# Altium PCB JLC_LED_PCB.PcbDoc (part 2 of 2)
Units mm, origin at the board's own origin, x right, y up, seen from the top; angles counter-clockwise.
Board outline 99.87 x 66.87 mm, 2 copper layers (Top Layer, Bottom Layer); 124 components, 99 nets, 405 pads, 296 vias.
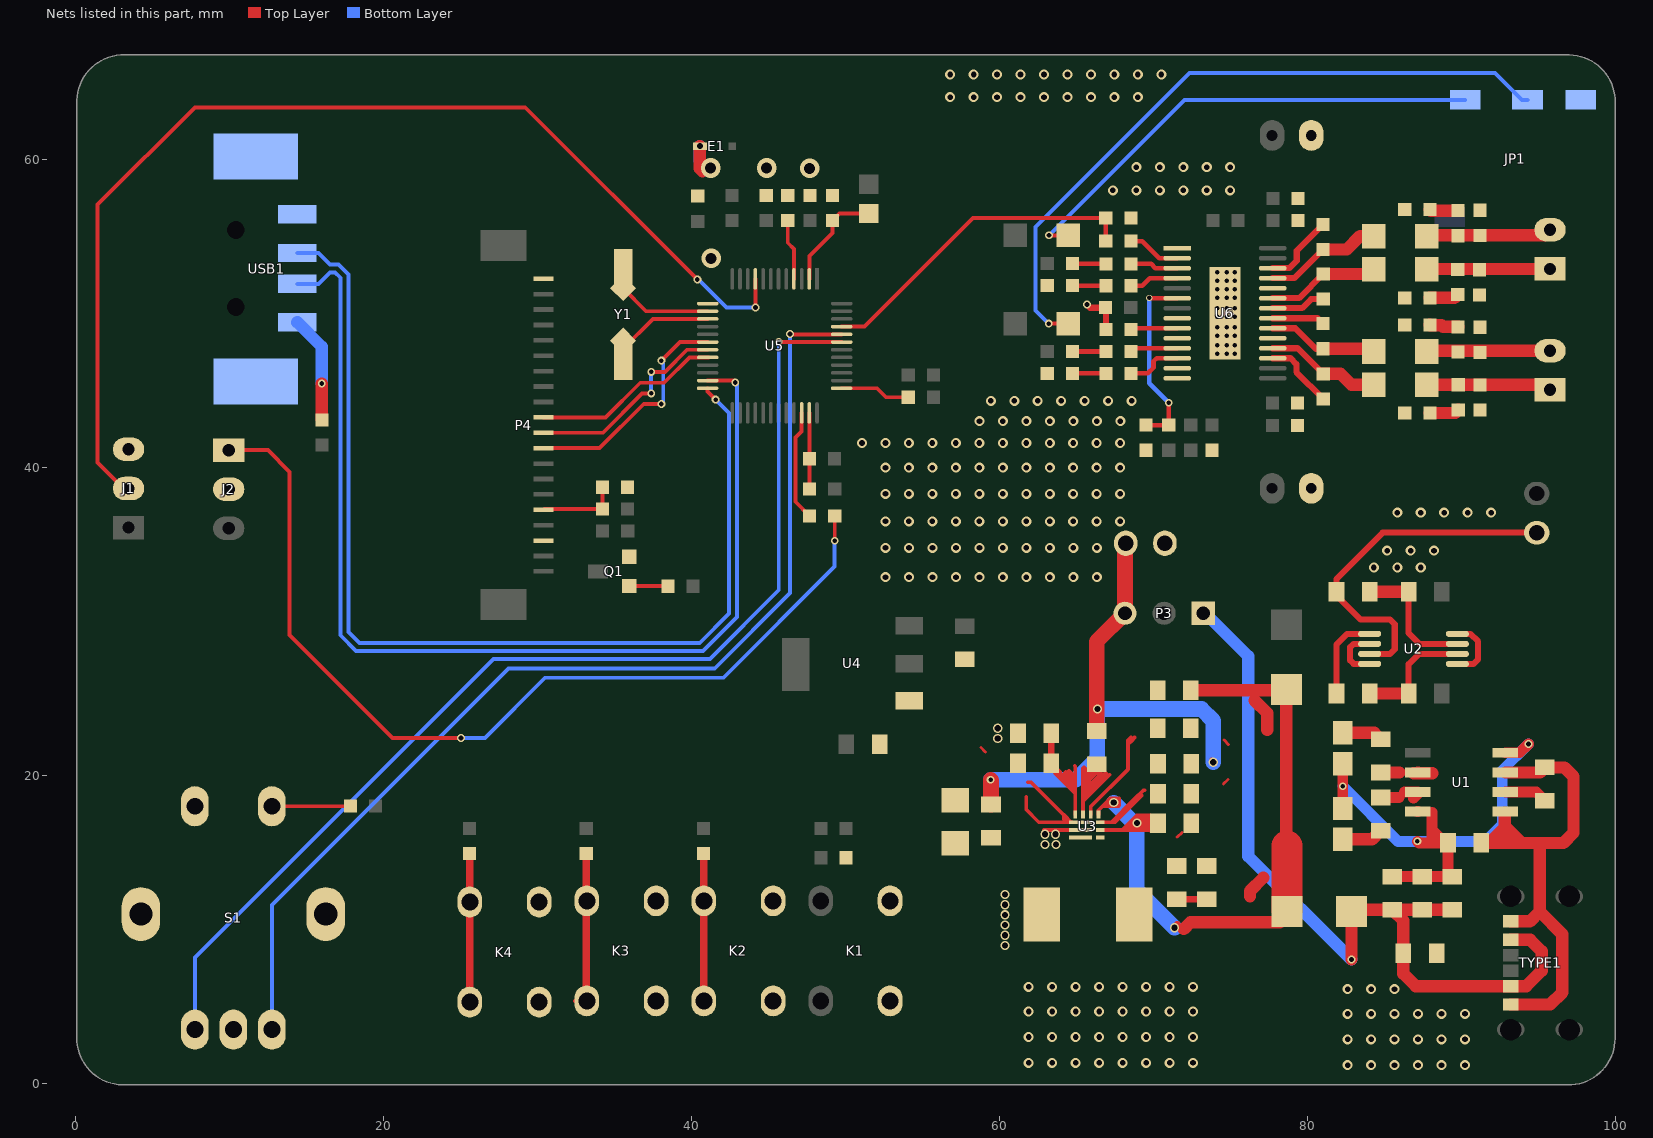
[diagram p2: the nets of this part, all layers, seen from the top]

## Via types
v1: diameter 0.65, hole 0.365, Top Layer to Bottom Layer, tented both sides, 174 vias
v2: diameter 0.508, hole 0.305, Top Layer to Bottom Layer, 51 vias
v3: diameter 0.6, hole 0.3, Top Layer to Bottom Layer, 38 vias
v4: diameter 0.6, hole 0.4, Top Layer to Bottom Layer, 17 vias
v5: diameter 3.2, hole 3, Top Layer to Bottom Layer, 5 vias
v6: diameter 1.27, hole 0.711, Top Layer to Bottom Layer, 4 vias
v7: diameter 0.5, hole 0.3, Top Layer to Bottom Layer, 4 vias
v8: diameter 0.4, hole 0.305, Top Layer to Bottom Layer, 1 vias
v9: diameter 0.4, hole 0.3, Top Layer to Bottom Layer, 1 vias
v10: diameter 0.6/0.6 (per signal layer), hole 0.3, Top Layer to Bottom Layer, 1 vias

## Nets (pads, with @x,y where several pads share a name; then routed paths per layer and width w, separated by ;. In a path a pad name is that pad's centre, name@x,y a point inside that pad or via, vN(x,y) a via of type N, cw(c..) or ccw(c..) an arc to the next point about the centre after c; other vN are vias at no path point) (continued)
GND: C1.2 C2.2 C3.1 C5.1 C6.2 C7.1 C8.1 C9.2 C10.2 C11.1 C12.1 C16.1 C17.1 C18.1 C19.1 C21.2 C22.2 C23.2 C24.2 C25.2 C31.2 C34.2 C35.1 C37.1 C41.2 C43.2 C44.1 C45.1 E1.2@40.521,60.884 J1.3 J2.2 JP1.1 K1.2 K2.2 K3.2 K4.2 L2.1 P2.2 P4.3 P4.20 Q1.2 R6.1 R8.2 R13.1 R14.1 R23.2 R24.1 R30.2 R33.1 R34.1 R36.1 R38.1 R39.1 R41.1 R42.1 S1.2 S1.5 S1.6 S1.7 TYPE1.1 TYPE1.6 U1.1 U1.3 U2.6 U3.3 U3.4 U4.1 U5.13 U6.1 U6.8 U6.10 U6.13 U6.14 U6.19 U6.24 U6.29 USB1.4 USB1.5 USB1.6 | length 51.5
  Top Layer w0.2: 71.514,16.029 71.819,16.308 ; 74.511,19.483 74.816,19.762 ; 74.562,22.328 74.841,22.023 ; C3.1@88.354,8.151 C3.1@88.354,8.481
  Top Layer w0.4: v2(65.659,50.597) 65.862,50.394 C34.2@66.866,50.394 66.889,50.371 C35.1@66.889,48.971 ; C2.2@86.54,25.347 86.54,27.241 87.216,27.917 U2.6@89.705,27.917
  Top Layer w0.8: E1.2@40.521,60.884 40.521,59.431 v6@40.694,59.258 ; R8.2@84.011,25.347 86.515,25.347 85.753,25.347 ; C1.2@91.25,15.644 91.783,15.644 ; 92.774,16.609 U1.1@92.774,17.606 ; U1.3@92.824,20.222 95.066,20.222 R6.1@95.39,20.546 96.657,20.546 97.244,19.959 97.244,16.304 96.584,15.644 94.793,15.644 ; TYPE1.1@93.168,5.149 95.725,5.149 96.52,5.944 96.52,9.71 95.047,11.184 ; TYPE1.6@93.168,10.549 94.412,10.549 95.047,11.184 ; 91.783,15.644 92.824,16.685 ; 91.783,15.644 92.901,15.644 ; 92.824,16.685 92.824,15.72 92.901,15.644 ; 92.824,16.685 93.866,15.644 ; 92.901,15.644 93.866,15.644 ; 93.866,15.644 94.793,15.644 ; 94.793,15.644 95.047,15.39 95.047,11.184
  Bottom Layer w0.8: 40.499,59.919 40.521,59.941 E1.2@40.521,60.884
  other v1: 82.575,1.219 84.099,1.219 85.623,1.219 87.147,1.219 88.671,1.219 90.195,1.219 61.874,1.372 63.398,1.372 64.922,1.372 66.446,1.372 67.97,1.372 69.494,1.372 71.018,1.372 72.542,1.372 82.575,2.895 84.099,2.895 85.623,2.895 87.147,2.895 88.671,2.895 90.195,2.895 61.874,3.047 63.398,3.047 64.922,3.047 66.446,3.047 67.97,3.047 69.494,3.047 71.018,3.047 72.542,3.047 82.575,4.547 84.099,4.547 85.623,4.547 87.147,4.547 88.671,4.547 90.195,4.547 61.874,4.699 63.398,4.699 64.922,4.699 66.446,4.699 67.97,4.699 69.494,4.699 71.018,4.699 72.542,4.699 82.575,6.147 84.099,6.147 85.623,6.147 61.874,6.299 63.398,6.299 64.922,6.299 66.446,6.299 67.97,6.299 69.494,6.299 71.018,6.299 72.542,6.299 52.578,32.903 54.102,32.903 55.626,32.903 57.15,32.903 58.674,32.903 60.198,32.903 61.722,32.903 63.246,32.903 64.77,32.903 66.294,32.903 84.277,33.528 85.801,33.528 87.325,33.528 85.141,34.619 86.665,34.619 88.189,34.619 52.578,34.804 54.102,34.804 55.626,34.804 57.15,34.804 58.674,34.804 60.198,34.804 61.722,34.804 63.246,34.804 64.77,34.804 66.294,34.804 52.572,36.525 54.096,36.525 55.62,36.525 57.144,36.525 58.668,36.525 60.192,36.525 61.716,36.525 63.24,36.525 64.764,36.525 66.288,36.525 67.812,36.525 85.801,37.084 87.325,37.084 88.849,37.084 90.373,37.084 91.897,37.084 52.572,38.303 54.096,38.303 55.62,38.303 57.144,38.303 58.668,38.303 60.192,38.303 61.716,38.303 63.24,38.303 64.764,38.303 66.288,38.303 67.812,38.303 52.572,40.005 54.096,40.005 55.62,40.005 57.144,40.005 58.668,40.005 60.192,40.005 61.716,40.005 63.24,40.005 64.764,40.005 66.288,40.005 67.812,40.005 51.048,41.605 52.572,41.605 54.096,41.605 55.62,41.605 57.144,41.605 58.668,41.605 58.668,41.605 60.192,41.605 61.716,41.605 63.24,41.605 64.764,41.605 66.288,41.605 67.812,41.605 58.674,43.028 60.198,43.028 61.722,43.028 63.246,43.028 64.77,43.028 66.294,43.028 67.818,43.028 59.411,44.343 60.935,44.343 62.459,44.343 63.983,44.343 65.507,44.343 67.031,44.343 68.555,44.343 67.335,58.014 68.859,58.014 70.383,58.014 71.907,58.014 73.431,58.014 74.955,58.014 68.859,59.512 70.383,59.512 71.907,59.512 73.431,59.512 74.955,59.512 56.769,64.059 58.293,64.059 59.817,64.059 61.341,64.059 62.865,64.059 64.389,64.059 65.913,64.059 67.437,64.059 68.961,64.059 56.769,65.532 58.293,65.532 59.817,65.532 61.341,65.532 62.865,65.532 64.389,65.532 65.913,65.532 67.437,65.532 68.961,65.532 70.485,65.532
  other v3: 74.117,47.396 74.727,47.396 75.26,47.396 74.117,47.955 74.727,47.955 75.26,47.955 74.117,48.565 74.727,48.565 75.26,48.565 74.117,49.124 74.727,49.124 75.26,49.124 74.117,49.809 74.727,49.809 75.26,49.809 74.117,50.368 74.727,50.368 75.26,50.368 74.117,51.029 74.727,51.029 75.26,51.029 74.117,51.587 74.727,51.587 75.26,51.587 74.117,52.146 74.727,52.146 75.26,52.146 74.117,52.705 74.727,52.705 75.26,52.705
  other v4: 59.861,22.429 59.861,23.09
  other v6: 41.25,53.594 47.648,59.436 41.225,59.461 44.856,59.461
GVDD: C35.2 U6.9 | length 2.9
  Top Layer w0.3: C35.2@68.611,49.063 U6.9@71.513,49.063
HPVDD: C15.2 R16.1 U5.35 | length 4.9
  Top Layer w0.254: U5.35@47.629,43.562 47.629,40.602 C15.2@47.641,40.589 47.641,38.641 R16.1@47.648,38.633
IRDA: R26.1 U5.34 | length 7.2
  Top Layer w0.254: U5.34@47.129,43.562 47.129,42.353 46.736,41.961 46.736,37.793 R26.1@47.648,36.881
L+: C25.1 C26.2 J3.2 L3.2 | length 8.1
  Top Layer w0.8: L3.2@87.75,55.087 C25.1@91.173,55.087 95.357,55.087 J3.2@95.717,55.448
L-: C29.2 C31.1 J3.1 L4.2 | length 8.1
  Top Layer w0.254: J3.1@95.659,53.008 J3.1@95.758,52.908
  Top Layer w0.8: L4.2@87.73,52.908 J3.1@95.717,52.908
LED: J1.2 U5.9 | length 72
  Top Layer w0.254: J1.2@3.429,38.659 3.099,38.659 1.422,40.335 1.422,57.085 7.736,63.398 29.185,63.398 v2(40.361,52.222) ; v2(44.129,50.41) U5.9@44.129,52.262
  Bottom Layer w0.254: v2(40.361,52.222) 40.437,52.222 42.249,50.41 v2(44.129,50.41)
MODE: R42.2 R43.2 U6.6 | length 12.1
  Top Layer w0.3: R42.2@69.494,42.768 R43.2@70.968,42.768 v2(70.968,44.221) ; v9(69.698,51.029) 69.713,51.013 U6.6@71.513,51.013
  Bottom Layer w0.3: v9(69.698,51.029) 69.698,45.491 v2(70.968,44.221)
MUTE: R23.1 R31.1 U5.45 | length 21.6
  Top Layer w0.254: U5.45@49.729,49.162 51.219,49.162 58.268,56.21 R23.1@66.874,56.21
  Top Layer w0.3: R31.1@66.874,54.712 R23.1@66.874,56.21
NetC1_1: C1.1 CHRG.2 R1.2 R2.2 R3.2 STDBY.2 U1.4 U1.8 | length 35.4
  Top Layer w0.7: CHRG.2@82.258,17.879 v7(82.258,19.333) STDBY.2@82.258,20.787 ; R3.2@85.484,13.459 R2.2@87.414,13.459 R1.2@89.37,13.459 89.091,13.739 C1.1@89.091,15.644 C1.1@88.913,15.644 ; v7(87.109,15.745) 87.211,15.644 C1.1@88.913,15.644 ; U1.8@87.109,17.667 U1.8@87.124,17.682 ; 88.049,15.695 88.049,17.616 ; 88.064,17.631 88.064,16.492 C1.1@88.913,15.644 ; C1.1@88.964,15.593 C1.1@88.913,15.644 ; U1.4@92.824,21.492 93.745,21.492 v7(94.323,22.07)
  Bottom Layer w0.7: v7(82.258,19.333) 85.846,15.745 v7(87.109,15.745) 91.529,15.745 92.621,16.838 92.621,20.368 v7(94.323,22.07)
NetC4_1: C4.1 P1.2 U2.3 | length 23.3
  Top Layer w0.4: U2.3@84.005,27.917 85.337,27.917 85.636,28.217 85.636,29.842 85.331,30.147 83.426,30.147 81.852,31.722 C4.1@81.852,31.951 81.852,32.779 84.86,35.787 P1.2@94.864,35.787
NetC4_2: C4.2 R7.2 U2.7 | length 8.7
  Top Layer w0.4: R7.2@86.54,31.951 86.54,29.269 87.242,28.567 U2.7@89.705,28.567
  Top Layer w0.8: C4.2@84.011,31.951 R7.2@86.54,31.951
NetC5_2: C5.2 R10.1 U3.6 | length 7.1
  Top Layer w0.25: U3.6@66.521,16.99 67.243,16.99 ; 66.993,16.986 67.239,16.986 ; 67.467,16.986 67.463,16.99 ; 69.202,18.721 68.974,18.492 ; 69.38,19.061 69.314,19.061 68.745,18.492 ; 67.239,16.986 67.243,16.99 ; 67.239,16.986 67.459,16.986 67.463,16.99 ; 67.243,16.99 68.745,18.492 ; 67.243,16.99 67.463,16.99 ; 67.463,16.99 68.34,17.867 68.348,17.867 68.974,18.492 ; 68.745,18.492 68.974,18.492
NetC6_1: C6.1 C7.2 C8.2 D1.2 D2.2 L1.1 R11.1 U3.5 U3.7 | length 68.7
  Top Layer w0.25: U3.7@66.396,17.49 66.396,17.769 66.711,18.084 ; U3.5@66.521,16.49 66.525,16.486 67.958,16.486 ; v4(67.399,18.264) 67.348,18.213 66.84,18.213 ; 68.593,16.689 v4@68.771,16.689 ; v4@68.961,16.879 68.898,16.816 v4@68.771,16.689 ; v4@69.05,16.791 69.253,16.994 69.253,17.07 ; C6.1@69.837,16.486 69.431,16.486 ; C6.1@70.269,16.918 C6.1@70.091,17.095 ; 66.711,18.084 66.84,18.213 ; 66.711,18.084 66.76,18.035 67.018,18.035 ; 66.84,18.213 67.145,18.518 67.729,18.518 67.755,18.492 67.755,18.086 67.704,18.035 67.399,18.035 67.018,18.035 ; 66.84,18.213 67.018,18.035 ; 67.958,16.486 68.898,17.426 69.202,17.426 ; 67.958,16.486 68.263,16.486 ; 68.263,16.486 69.05,17.273 ; 68.263,16.486 69.179,16.486 ; v4@68.771,16.689 69.142,16.689 69.244,16.791 69.523,17.07 ; 69.05,17.273 69.253,17.07 ; 69.05,17.273 69.202,17.426 ; 69.05,17.273 69.726,17.273 ; 69.179,16.486 69.329,16.587 69.431,16.486 ; 69.179,16.486 69.431,16.486 ; 69.202,17.426 69.761,17.426 C6.1@69.914,17.273 ; 69.253,17.07 69.523,17.07 ; 69.523,17.07 70.066,17.07 C6.1@70.091,17.095 ; 69.523,17.07 69.726,17.273 ; 69.726,17.273 C6.1@69.914,17.273 ; C6.1@69.914,17.273 C6.1@70.091,17.095
  Top Layer w0.4: C6.1@70.269,16.918 C6.1@70.142,16.791 ; C6.1@70.498,16.486 69.837,16.486 C6.1@70.142,16.791 ; v4(71.336,10.136) 71.514,10.314 71.514,10.39 ; C8.2@71.488,11.99 C7.2@73.419,11.99 ; v4@69.05,16.791 68.898,16.791 68.898,16.816 v4(68.898,16.943) 68.961,16.879 v4@69.05,16.791 ; v4@69.05,16.791 69.244,16.791 C6.1@70.142,16.791
  Top Layer w0.5: 78.6,15.356 78.642,15.314 78.727,15.229
  Top Layer w0.8: 71.946,10.06 72.377,10.491 D1.2@78.169,10.491 ; R11.1@72.403,25.554 78.6,25.554 78.6,15.898 ; 76.238,12.189 76.238,12.52 77.102,13.383 ; 76.543,24.889 77.356,24.077 77.356,22.984 ; 78.169,15.491 78.6,15.461 ; D1.2@78.6,10.898 78.6,15.229 ; 78.727,15.229 78.642,15.229 78.6,15.229 ; 78.6,15.229 78.6,15.356 78.6,15.413 ; 78.6,15.229 78.431,15.229 78.6,15.413 ; 78.6,15.413 78.6,15.461 ; 78.6,15.413 78.642,15.458 ; 78.6,15.461 78.6,15.465 ; 78.6,15.461 78.642,15.458 ; 78.6,15.465 78.642,15.458 ; 78.6,15.465 78.228,15.525 78.6,15.898 ; 78.6,15.465 78.6,15.898
  Top Layer w2: D1.2@78.642,11.275 78.642,15.229 78.642,15.314 78.642,15.458
  Bottom Layer w0.5: v4@68.898,16.714 v4(68.898,16.943)
  Bottom Layer w1.016: v4(67.399,18.264) 68.783,16.833 68.898,16.714 68.898,12.574 v4(71.336,10.136)
NetC26_1: C26.1 R24.2 | length 1.9
  Top Layer w0.8: R24.2@87.917,56.769 87.991,56.695 C26.1@89.751,56.695
NetC27_1: C27.1 R32.2 | length 2.2
  Top Layer w0.3: R32.2@64.734,53.238 C27.1@66.889,53.238
NetC27_2: C27.2 U6.3 | length 3.1
  Top Layer w0.3: C27.2@68.519,53.238 69.825,53.238 70.1,52.963 U6.3@71.513,52.963
NetC28_1: C28.1 U6.26 | length 4.8
  Top Layer w0.4: U6.26@77.713,52.963 78.795,52.963 79.273,53.442 79.273,54.091 C28.1@80.988,55.806
NetC28_2: C28.2 L3.1 U6.25 | length 7.7
  Top Layer w0.4: U6.25@77.713,52.313 79.125,52.313 C28.2@80.988,54.176
  Top Layer w0.8: C28.2@80.988,54.176 82.522,54.176 83.388,55.042 L3.1@84.284,55.042
NetC29_1: C29.1 R34.2 | length 1.9
  Top Layer w0.8: R34.2@87.917,51.029 89.507,51.029 C29.1@89.73,51.252
NetC30_1: C30.1 R33.2 | length 2.2
  Top Layer w0.3: R33.2@64.738,51.816 C30.1@66.889,51.816
NetC30_2: C30.2 U6.4 | length 3.2
  Top Layer w0.3: C30.2@68.519,51.816 69.24,51.816 69.737,52.313 U6.4@71.513,52.313
NetC32_1: C32.1 U6.22 | length 3.5
  Top Layer w0.4: U6.22@77.713,50.363 79.624,50.363 80.213,50.952 C32.1@80.993,50.952
NetC32_2: C32.2 L4.1 U6.23 | length 7.3
  Top Layer w0.4: U6.23@77.713,51.013 79.423,51.013 C32.2@80.993,52.582
  Top Layer w0.8: C32.2@80.993,52.582 83.984,52.582 L4.1@84.284,52.883
NetC33_1: C33.1 R36.2 | length 1.9
  Top Layer w0.8: R36.2@87.917,49.276 87.942,49.251 88.671,49.251 88.771,49.151 C33.1@89.756,49.151
NetC36_1: C36.1 U6.21 | length 3.4
  Top Layer w0.4: U6.21@77.713,49.713 80.632,49.713 C36.1@80.988,49.357
NetC36_2: C36.2 L5.1 U6.20 | length 7.2
  Top Layer w0.4: U6.20@77.713,49.063 79.182,49.063 80.518,47.727 C36.2@80.988,47.727
  Top Layer w0.8: C36.2@80.988,47.727 84.106,47.727 L5.1@84.284,47.549
NetC38_1: C38.1 R37.2 | length 2.2
  Top Layer w0.3: R37.2@64.709,47.549 C38.1@66.889,47.549
NetC38_2: C38.2 U6.11 | length 2.8
  Top Layer w0.3: C38.2@68.733,47.763 U6.11@71.513,47.763
NetC39_1: C39.1 R38.2 | length 2.2
  Top Layer w0.3: R38.2@64.709,46.126 C39.1@66.889,46.126
NetC39_2: C39.2 U6.12 | length 3.6
  Top Layer w0.3: C39.2@68.519,46.126 69.596,46.126 69.977,46.507 69.977,46.914 70.176,47.113 U6.12@71.513,47.113
NetC40_1: C40.1 U6.17 | length 4.7
  Top Layer w0.4: U6.17@77.713,47.113 78.871,47.113 79.248,46.736 79.248,46.216 C40.1@80.993,44.471
NetC40_2: C40.2 L6.1 U6.18 | length 7.6
  Top Layer w0.4: U6.18@77.713,47.763 79.331,47.763 C40.2@80.993,46.101
  Top Layer w0.8: C40.2@80.993,46.101 82.118,46.101 82.829,45.39 L6.1@84.284,45.39
NetC42_1: C42.1 R39.2 | length 1.9
  Top Layer w0.8: R39.2@87.917,43.561 89.559,43.561 C42.1@89.761,43.763
NetC46_1: C46.1 JP1.2 | length 44.7
  Top Layer w0.254: v2(63.17,49.357) C46.1@64.44,49.357
  Bottom Layer w0.254: v2(63.17,49.357) 62.306,50.22 62.306,55.626 72.314,65.634 92.151,65.634 93.904,63.881 JP1.2@94.264,63.881
NetC47_1: C47.1 JP1.3 | length 31.9
  Top Layer w0.254: v2(63.195,55.093) C47.1@64.44,55.093
  Bottom Layer w0.254: v2(63.195,55.093) 71.984,63.881 JP1.3@90.214,63.881
NetCHRG_1: CHRG.1 R4.1 | length 2.7
  Top Layer w0.8: CHRG.1@82.258,15.879 83.064,15.879 83.071,15.872 84.163,15.872 R4.1@84.722,16.431
NetJ2_1: J2.1 R26.2 | length 61.2
  Top Layer w0.254: J2.1@9.931,41.148 12.471,41.148 13.894,39.726 13.894,29.134 20.574,22.454 v2(25.019,22.454) ; v2(49.278,35.257) R26.2@49.278,36.881
  Bottom Layer w0.254: v2(25.019,22.454) 26.568,22.454 30.48,26.365 42.062,26.365 49.276,33.579 49.276,35.255 v2(49.278,35.257)
NetK2_1: K2.1 R19.2 | length 9.6
  Top Layer w0.5: R19.2@40.767,14.958 40.767,5.397 K2.1@40.777,5.387
NetK3_1: K3.1 R20.2 | length 9.6
  Top Layer w0.5: R20.2@33.147,14.958 33.147,5.422 K3.1@33.183,5.386
NetK4_1: K4.1 R21.2 | length 19.3
  Top Layer w0.254: R21.2@25.578,14.956 25.588,14.946 K4.1@25.588,11.808 K4.1@25.588,5.308
  Top Layer w0.4: K4.1@25.578,5.318 K4.1@25.588,5.308
  Top Layer w0.5: K4.1@25.578,5.318 R21.2@25.578,14.956
NetL1_2: L1.2 U3.2 | length 2.4
  Top Layer w0.25: v4@62.856,16.49 63.614,16.49 U3.2@65.246,16.49
  other v4: 60.338,8.993 60.338,9.653 60.338,10.314 60.338,10.974 60.338,11.634 60.338,12.295 62.929,15.546 63.64,15.546 62.929,16.206 63.614,16.206
NetQ1_1: Q1.1 R29.2 | length 2.5
  Top Layer w0.254: Q1.1@35.941,32.316 38.446,32.316 R29.2@38.453,32.309
NetR4_2: R4.2 U1.7 | length 2.6
  Top Layer w0.7: R4.2@84.722,18.59 85.916,18.59 ; 86.277,18.952 U1.7@87.124,18.952 ; 86.855,18.539 87.196,18.88 U1.7@87.217,18.901
NetR5_1: R5.1 STDBY.1 | length 2.6
  Top Layer w0.8: STDBY.1@82.258,22.787 84.31,22.787 R5.1@84.722,22.375
NetR5_2: R5.2 U1.6 | length 3.8
  Top Layer w0.245: 85.814,20.089 85.941,20.216 85.947,20.222 ; U1.6@86.887,20.171 88.064,20.171
  Top Layer w0.8: R5.2@84.722,20.216 85.687,20.216 85.941,20.216 ; U1.6@86.881,20.165 87.124,20.165 88.064,20.165 ; U1.6@87.124,20.216 U1.6@87.16,20.216
NetR6_2: R6.2 U1.2 | length 2.8
  Top Layer w0.7: U1.2@92.824,18.952 94.825,18.952 R6.2@95.39,18.387
NetR8_1: R8.1 U2.1 | length 5.6
  Top Layer w0.4: R8.1@81.852,25.347 81.852,28.522 82.547,29.217 U2.1@84.005,29.217
NetR9_1: R9.1 U3.9 | length 16
  Top Layer w0.25: U3.9@65.396,17.49 65.396,18.391 ; 66.104,20.143 65.396,19.436 ; R9.1@66.434,20.728 65.621,19.915 ; 67.12,20.067 65.443,18.391 65.396,18.391 ; 65.396,18.391 65.396,18.674 ; 65.396,18.674 66.878,20.156 66.891,20.169 66.815,20.169 65.545,18.899 65.396,18.899 ; 65.396,18.674 65.396,18.899 ; 65.396,18.899 65.396,18.979 ; 65.396,18.979 66.586,20.169 66.26,20.169 65.396,19.305 ; 65.396,18.979 65.396,19.305 ; 65.396,19.305 65.396,19.436 ; 65.396,19.436 65.396,19.69 ; 65.396,19.69 65.396,20.478 65.469,20.55 65.621,20.397 65.621,19.915 ; 65.396,19.69 65.621,19.915
NetR11_2: R11.2 R13.2 U3.8 | length 7
  Top Layer w0.25: U3.8@65.896,17.49 65.896,18.006 68.313,20.423 68.313,22.048 ; 68.517,22.506 68.313,22.302 ; 68.745,22.48 68.567,22.302 ; 68.313,22.048 68.313,22.302 ; 68.313,22.048 68.567,22.302 ; 68.313,22.302 68.567,22.302
NetR12_1: R12.1 R14.2 U3.10 | length 12.9
  Top Layer w0.25: 64.503,19.458 64.478,19.483 ; 64.859,20.651 64.896,20.614 64.896,18.861 ; U3.10@64.896,17.49 64.896,18.861 ; 63.792,19.966 R12.1@63.792,20.369 ; 63.792,19.966 63.332,20.425 R12.1@63.332,20.829 R12.1@63.792,20.369 ; 63.792,19.966 64.072,19.686 ; 63.792,19.966 63.919,20.093 63.919,20.242 R12.1@63.792,20.369 ; 64.072,19.686 64.072,20.042 64.275,20.245 64.275,19.686 64.478,19.483 ; 64.072,19.686 64.656,19.102 ; 64.478,19.483 64.478,20.321 64.656,20.143 64.656,19.102 ; 64.656,19.102 64.896,18.861
  Top Layer w0.4: R12.1@63.332,20.829 63.335,20.832 R14.2@63.335,22.76
NetR22_2: R22.2 S1.4 | length 5.1
  Top Layer w0.254: S1.4@12.736,18.024 R22.2@17.821,18.024
NetR25_2: R25.2 USB1.1 | length 7
  Top Layer w0.8: R25.2@15.977,43.131 v2(15.977,45.466)
  Bottom Layer w0.8: USB1.1@14.389,49.444 15.977,47.856 v2(15.977,45.466)
NetR31_2: R31.2 U6.2 | length 3.3
  Top Layer w0.3: R31.2@68.62,54.712 69.24,54.712 70.339,53.613 U6.2@71.513,53.613
NetU2_2: U2.2 U2.4 | length 3.6
  Top Layer w0.4: U2.4@84.005,27.267 82.979,27.267 82.741,27.506 82.741,28.344 82.964,28.567 U2.2@84.005,28.567
NetU2_5: U2.5 U2.8 | length 4.2
  Top Layer w0.4: U2.5@89.705,27.267 90.757,27.267 91.046,27.556 91.046,28.725 90.554,29.217 U2.8@89.705,29.217
NetU5_14: U5.14 Y1.2 | length 6.1
  Top Layer w0.254: Y1.2@35.535,51.662 37.035,50.162 U5.14@41.029,50.162
NetU5_15: U5.15 Y1.1 | length 7.1
  Top Layer w0.254: Y1.1@35.535,46.962 35.535,47.727 37.47,49.662 U5.15@41.029,49.662
R+: C41.1 C42.2 J4.1 L6.2 | length 8.1
  Top Layer w0.254: J4.1@95.415,45.362 J4.1@95.717,45.06
  Top Layer w0.8: L6.2@87.704,45.39 95.387,45.39 J4.1@95.415,45.362
R-: C33.2 C37.2 J4.2 L5.2 | length 8
  Top Layer w0.8: L5.2@87.704,47.549 87.755,47.6 J4.2@95.717,47.6
RDB: P4.11 U5.20 | length 12.3
  Top Layer w0.254: P4.11@30.383,43.274 34.409,43.274 36.653,45.518 38.203,45.518 39.847,47.162 U5.20@41.029,47.162 U5.20@41.085,47.162
RS: P4.9 U5.18 | length 15.3
  Top Layer w0.254: P4.9@30.383,41.274 34.009,41.274 36.881,44.145 v2(38.024,44.145) ; v2(38.024,46.959) 39.227,48.162 U5.18@41.029,48.162
  Bottom Layer w0.254: v2@37.948,46.959 38.147,46.759 38.147,44.269 v2(38.024,44.145)
RTCVDD: C18.2 U5.4 | length 4
  Top Layer w0.254: C18.2@46.228,56.051 46.228,54.61 46.629,54.209 U5.4@46.629,52.262
S1: S1.1 U5.44 | length 70.3
  Top Layer w0.254: v2(46.38,48.692) 46.41,48.662 U5.44@49.729,48.662
  Bottom Layer w0.254: S1.1@12.736,3.524 12.736,11.618 28.092,26.975 41.491,26.975 46.38,31.864 v2(46.38,48.692)
S2: S1.3 U5.43 | length 72.7
  Top Layer w0.254: v2(45.644,48.184) 45.72,48.108 45.774,48.162 U5.43@49.729,48.162
  Bottom Layer w0.254: S1.3@7.736,3.524 7.736,8.193 27.127,27.584 41.173,27.584 45.644,32.055 v2(45.644,48.184)
USBDX_N: U5.23 USB1.2 | length 70.6
  Top Layer w0.254: U5.23@41.029,45.662 42.705,45.662 v2(42.824,45.542)
  Bottom Layer w0.254: USB1.2@14.389,51.944 15.766,51.944 16.512,52.69 16.84,52.69 17.196,52.335 17.196,29.127 18.205,28.118 40.723,28.118 42.926,30.32 42.926,45.441 v2(42.824,45.542)
USBDX_P: U5.24 USB1.3 | length 68.1
  Top Layer w0.254: U5.24@41.029,45.162 41.029,44.943 v2(41.547,44.425)
  Bottom Layer w0.254: USB1.3@14.389,53.944 15.766,53.944 16.512,53.198 17.051,53.198 17.704,52.545 17.704,29.337 18.415,28.626 40.513,28.626 42.418,30.531 42.418,43.554 v2(41.547,44.425)
VCC: C3.2 D1.1 P3.1 R1.1 R2.1 R3.1 TYPE1.2 TYPE1.5 | length 54.4
  Top Layer w0.8: D1.1@82.428,11.25 82.478,11.3 R3.1@85.484,11.3 ; v2(82.834,8.082) D1.1@82.834,11.199 ; R3.1@85.458,11.275 R3.1@85.484,11.3 ; R1.1@89.37,11.3 R2.1@87.414,11.3 R3.1@85.484,11.3 ; TYPE1.5@93.168,9.349 94.436,9.349 95.174,8.611 95.174,7.343 94.179,6.349 TYPE1.2@93.168,6.349 86.996,6.349 86.195,7.15 C3.2@86.195,8.481 86.195,10.589 R3.1@85.484,11.3
  Bottom Layer w0.8: P3.1@73.203,30.556 73.33,30.556 76.124,27.762 76.124,14.783 82.829,8.077 v2(82.834,8.082)
VCOM: C14.1 U5.37 | length 4.6
  Top Layer w0.254: U5.37@49.729,45.162 52.019,45.162 52.603,44.577 C14.1@54.049,44.577
VDDIO: P4.5 R28.1 R30.1 | length 5.3
  Top Layer w0.254: P4.5@30.383,37.274 30.422,37.313 R28.1@34.206,37.313 R30.1@34.206,38.735
VMCU: C16.2 R15.2 U5.2 | length 7
  Top Layer w0.254: U5.2@47.629,52.262 47.629,53.75 49.124,55.245 C16.2@49.124,56.051 49.588,56.515 R15.2@51.493,56.515
VOUT: C9.1 C10.1 P2.1 P3.3 R9.2 R10.2 R12.2 U3.1 | length 46.7
  Top Layer w0.2: 58.776,21.845 59.055,21.54
  Top Layer w0.25: 61.709,18.645 61.709,17.807 62.526,16.99 64.355,16.99 ; 61.811,19.585 62.027,19.585 64.148,17.463 ; U3.1@64.685,16.99 U3.1@64.634,16.99 ; v4@73.724,21.058 73.851,20.931 v4(73.851,20.88) ; 64.148,17.463 64.148,17.197 64.355,16.99 ; 64.148,17.463 64.161,17.463 U3.1@64.634,16.99 ; 64.355,16.99 U3.1@64.634,16.99
  Top Layer w0.4: R9.2@65.926,22.887 66.281,23.242 66.332,23.293 v4(66.332,24.334)
  Top Layer w0.5: P2.1@68.123,35.052 P2.1@68.174,35.103
  Top Layer w1.016: v7(59.398,19.737) 59.423,19.712 C9.1@59.423,18.137 ; R9.2@66.281,22.912 66.281,23.242 66.281,28.715 P3.3@68.123,30.556 P2.1@68.123,35.052
  Bottom Layer w1.016: v7(59.398,19.737) 64.91,19.737 66.332,21.159 v4(66.332,24.334) 73.089,24.334 73.851,23.572 v4(73.851,20.88)
WRB: P4.10 U5.19 | length 13.7
  Top Layer w0.254: P4.10@30.383,42.274 34.222,42.274 36.779,44.831 v2(37.363,44.831) ; v2(37.363,46.228) 38.252,46.228 39.686,47.662 U5.19@41.029,47.662
  Bottom Layer w0.254: v2(37.363,44.831) v2(37.363,46.228)
pads on no net: E1.1@42.621,60.884 E1.2@40.521,60.884 JP1.4 P4.6 P4.21 P4.22 TYPE1.0 TYPE1.3 TYPE1.4 U5.1 U5.5 U5.6 U5.7 U5.8 U5.10 U5.33 U5.41 U5.42 U5.46 U5.47 U5.48 USB1.7 USB1.8 Y1.3 Y1.4
copper on no net:
  other v3: 90.005,18.419 90.767,18.438 89.167,19.619 90.005,19.619 90.767,19.638 89.167,20.819 90.005,20.819 90.767,20.838
  other v5: 19.012,2.896 58.603,4.418 96.545,28.575 2.972,64.086 34.138,64.086
  other v10: 89.167,18.419

## Polygon pours and split planes (outlines as drawn)
GND on Top Layer "Top Layer-GND 3" (solid, remove dead copper, pour order 21): 0.081,2.784 0.081,22.784 cw(c0.208,22.784) 0.081,22.784 0.081,63.598 cw(c3.104,63.779) 2.917,66.802 cw(c3.104,63.779) 2.918,66.802 2.917,66.802 cw(c2.926,66.675) 2.926,66.802 96.698,66.802 cw(c96.698,66.675) 96.718,66.801 cw(c96.737,66.675) 96.729,66.802 cw(c96.915,63.779) 99.938,63.965 cw(c99.811,63.957) 99.938,63.957 99.938,3.143 cw(c96.915,2.962) 99.943,2.962 cw(c96.915,2.962) 97.126,-0.059 cw(c97.104,0.066) 97.104,-0.061 3.286,-0.061 cw(c3.104,2.962) 0.081,2.776 cw(c0.208,2.784)
no net on Top Layer "Top Layer-No Net" (solid, pour order 10): 74.257,19.585
GND on Top Layer "Top Layer-GND 1" (solid, pour order 0): 71.92,19.483 71.946,19.458 74.511,19.458 74.511,13.489 59.398,13.489 59.398,8.409 55.588,8.409 55.588,16.537 62.192,16.537 62.192,14.886 71.717,14.886 71.717,19.483 74.511,19.483 74.511,19.458
GND on Top Layer "Top Layer-GND" (solid, pour order 8): 71.59,23.903 71.59,22.252 74.765,22.252 74.765,19.585 74.511,19.585 74.511,19.584 74.511,13.489 75.146,13.489 75.146,23.903
VOUT on Top Layer "Top Layer-VOUT" (solid, pour order 12): 64.402,17.222 62.04,19.585 61.913,19.458 61.913,16.867 64.402,16.867
no net on Top Layer "Top Layer-No Net 1" (solid, pour order 14): 62.014,16.867
GND on Top Layer "Top Layer-GND 2" (solid, pour order 2): 64.478,16.156 64.478,14.886 71.717,14.886 71.717,16.156
GND on Bottom Layer "Bottom Layer-GND" (solid, remove dead copper, pour order 22): 0.081,2.784 0.081,22.784 cw(c0.208,22.784) 0.081,22.784 0.081,63.598 cw(c3.104,63.779) 2.917,66.802 cw(c3.104,63.779) 2.918,66.802 2.917,66.802 cw(c2.926,66.675) 2.926,66.802 96.698,66.802 cw(c96.698,66.675) 96.718,66.801 cw(c96.737,66.675) 96.729,66.802 cw(c96.915,63.779) 99.938,63.965 cw(c99.811,63.957) 99.938,63.957 99.938,3.143 cw(c96.915,2.962) 99.943,2.962 cw(c96.915,2.962) 97.126,-0.059 cw(c97.104,0.066) 97.104,-0.061 3.286,-0.061 cw(c3.104,2.962) 0.081,2.776 cw(c0.208,2.784)
no net on Bottom Layer "Bottom Layer-No Net 1" (solid, pour order 4): 71.463,22.506
no net on Bottom Layer "Bottom Layer-No Net" (solid, pour order 6): 71.463,23.953
no net on Mechanical 1 (solid): 56.896,46.863 54.864,46.863 54.864,43.561 54.737,43.434 49.352,43.434 49.301,43.485 49.301,42.139 49.403,42.037 56.845,42.037 56.896,42.088
no net on Mechanical 1 (solid): 54.864,46.863 54.864,43.866 54.483,43.485 49.301,43.485 49.251,43.536 49.251,42.189 49.352,42.088 56.896,42.088 56.896,46.863

## Keep-outs
Keep-Out Layer:
  rectangle: 38.735,60.528 55.499,66.929
  region: 39.294,66.726
  lines w0.254: 0.203,2.743 0.203,63.602 cw(c3.099,63.779) 2.921,66.675 96.693,66.675 ; 0.203,2.769 ccw(c3.099,2.946) 3.277,0.051 97.049,0.051 ccw(c96.871,2.946) 99.766,3.124 ; 96.723,66.675 cw(c96.901,63.779) 99.797,63.957 99.797,3.124
  lines w0.5: 18.75,55.241 25.705,55.241 25.705,30.298 18.801,30.298 18.775,30.273 18.775,55.215

## Other copper
Top Layer:
  rectangle net AGND: 48.844,40.132 49.682,42.316
  rectangle net AGND: 47.879,42.291 49.682,44.565
  rectangle net GND: 71.59,22.252 73.368,23.903
  rectangle net GND: 74.384,19.407 74.765,19.585
  rectangle net GND: 71.869,22.429 72.934,23.75
  rectangle net GND: 71.717,15.978 74.511,19.585
  rectangle net GND: 71.133,15.673 72.276,16.079
  rectangle net GND: 70.269,13.489 74.511,15.165
  rectangle net GND: 70.676,13.59 74.308,14.682
  rectangle net GND: 64.478,15.292 67.374,16.156
  rectangle net GND: 64.478,15.648 66.993,16.156
  rectangle net GND: 59.398,21.998 62.065,24.03
  rectangle net GND: 55.588,14.682 60.465,16.537
  rectangle net GND: 55.944,14.098 58.839,14.886
  rectangle net NetC5_2: 68.872,18.213 70.828,21.769
  rectangle net NetC6_1: 67.297,9.171 74.308,13.057
  rectangle net NetL1_2: 62.522,15.165 64.046,16.613
  rectangle net NetL1_2: 59.83,8.383 63.97,12.828
  rectangle net NetR9_1: 65.265,20.067 67.247,21.337
  rectangle net NetR11_2: 68.186,22.328 70.768,26.62
  rectangle net NetR12_1: 62.776,20.194 65.011,23.801
  rectangle net VOUT: 55.588,21.54 58.89,24.03
  rectangle net VOUT: 55.588,17.426 62.141,21.617
  rectangle net VOUT: 65.265,22.379 67.297,25.02
  rectangle net VOUT: 71.92,19.94 74.435,21.82
  region net NetC6_1: 76.949,26.798 76.949,9.171 79.642,9.171 79.642,26.798
  region net NetC6_1: 74.155,13.057 74.155,9.171 77.051,9.171 77.051,13.057
  rectangle net NetC6_1: 71.793,24.614 77.102,26.798
  region net VOUT: 55.588,17.527 55.588,16.867 62.014,16.867 62.014,17.527
Bottom Layer:
  rectangle net NetL1_2: 62.522,8.358 64.046,16.613
  rectangle net NetL1_2: 59.83,8.358 64.097,12.828

## Silkscreen, mask and mechanical layers (free items; w line width, h text height)
Top Overlay:
  drawing of 1083 lines, arcs and shapes, not listed
  text "左声道" at 93.091,58.217 h1
  text "右声道" at 93.091,41.554 h1
  text "+" at 91.846,40.945 h1
  text "电源输出5V" at 69.469,37.897 h1
  text "5V-LED-GND" at 8.179,36.246 h1 r90
  text "LED接口" at 1.981,32.36 h1
  text "锂电池3.7V~4.2V" at 92.278,32.055 h1
  text "BAT-5V-VCC" at 68.021,28.448 h1
Bottom Overlay:
  lines w0.254: 65.596,25.826 19.003,25.826 19.003,60.526 65.703,60.526 65.703,25.826
  text "3.3V-GND-IR" at 14.173,35.789 h1 r270
  text "红外遥控接口" at 12.929,32.436 h1
Mechanical 1:
  lines w0.254: 96.698,66.675 2.926,66.675 ccw(c3.104,63.779) 0.208,63.602 ; 96.737,66.675 cw(c96.915,63.779) 99.811,63.957 99.811,3.124 ; 97.093,0.066 ccw(c96.915,2.962) 99.811,3.139 ; 97.104,0.066 3.282,0.066 cw(c3.104,2.962) 0.208,2.784 0.208,63.602 ; 0.208,63.602 0.208,63.602 ; 18.601,30.24 25.705,30.24 25.705,55.24 18.601,55.24 18.601,30.24